# Altium PCB PCB_ASADCHUADARY.pcbdoc
Units mil, origin at the board's own origin, x right, y up, seen from the top; angles counter-clockwise.
Board outline 5763.18 x 4356.46 mil, 2 copper layers (Top Layer, Bottom Layer); 71 components, 90 nets, 266 pads, 23 vias.
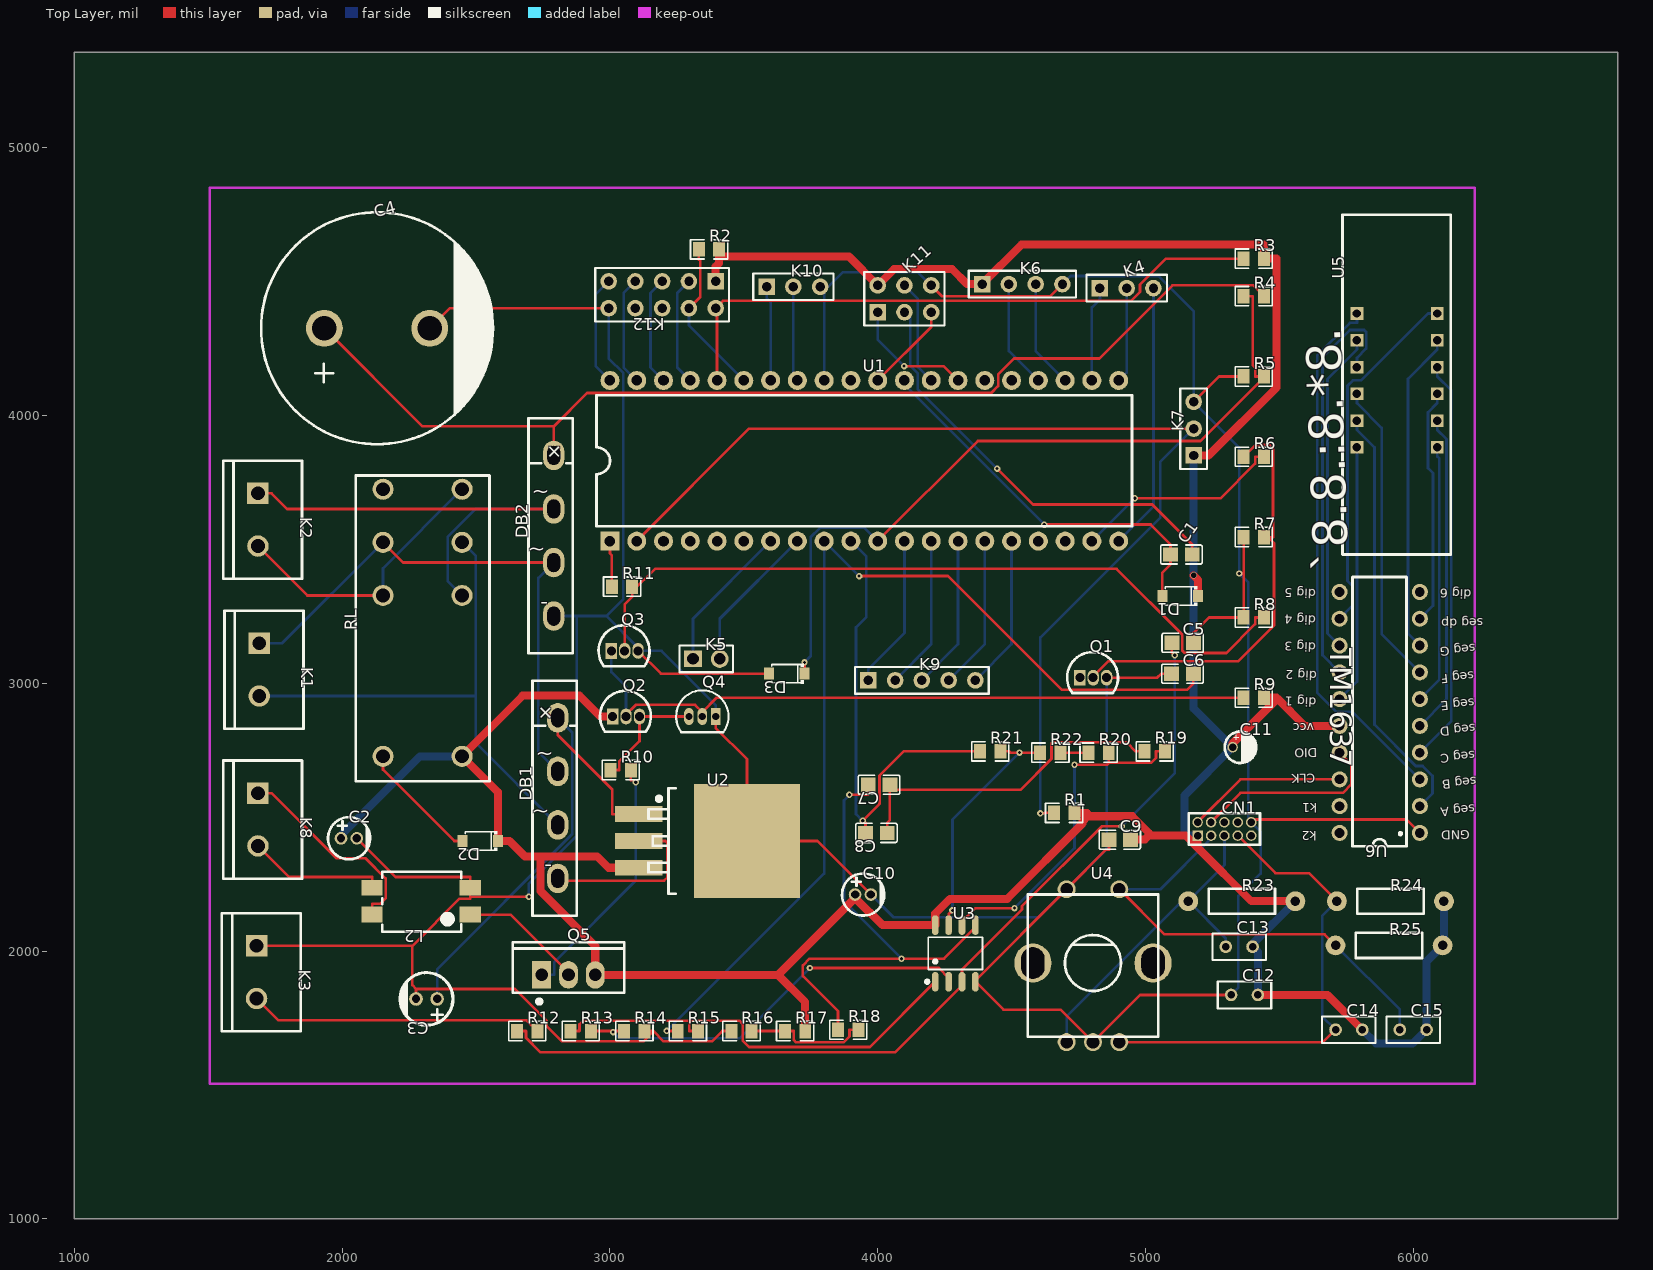
[diagram p0: Top Layer view]
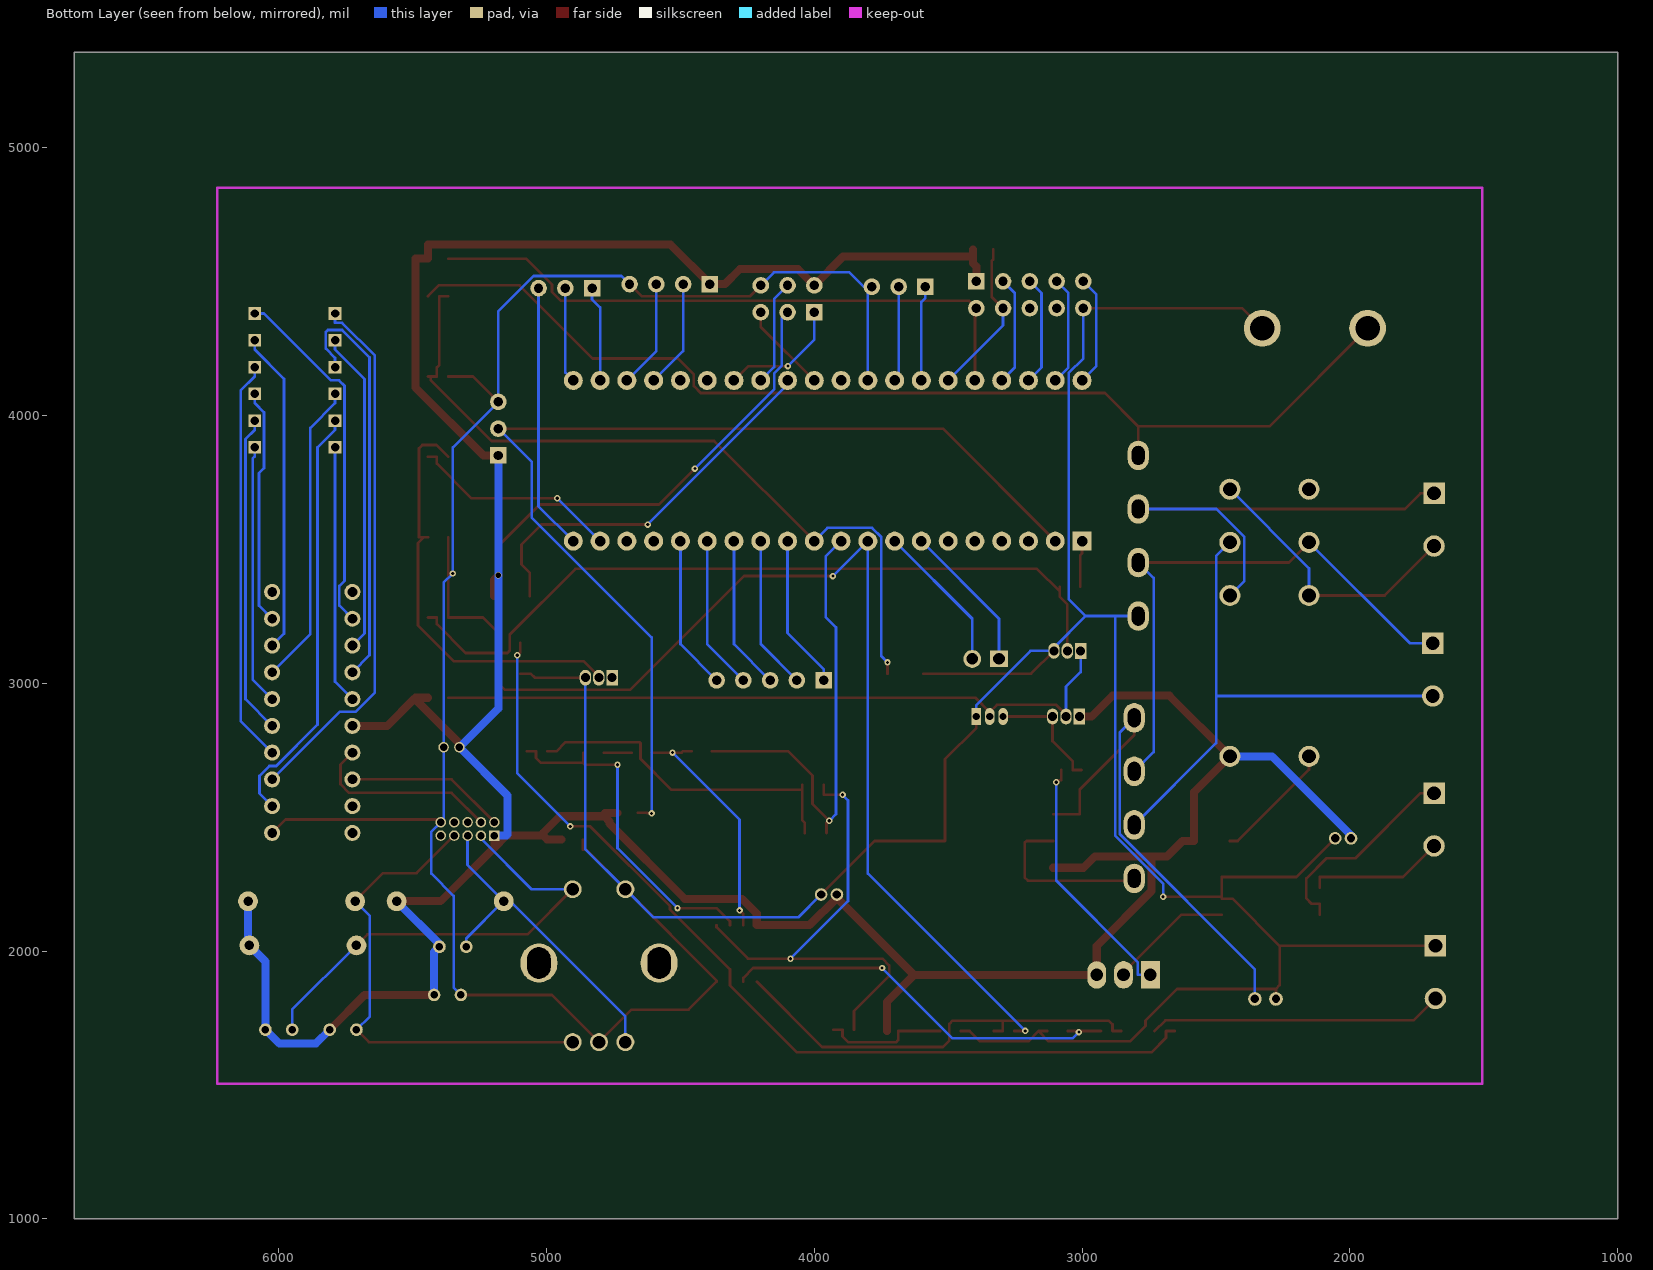
[diagram p1: Bottom Layer view, seen from below]

## Layer stack, top to bottom
Top Layer: signal copper (thickness not stored)
Dielectric: dielectric 12.6, FR-4, Dk 4.8
Bottom Layer: signal copper (thickness not stored)

## Board outline
6763.18,1000 1000,1000 1000,5356.46 6763.18,5356.46

## Components (designator, comment, footprint, x,y, rotation, side; value= is the part's Value field where it differs from the comment)
C1 "0.1u" C0805 5134.24,3481.46 r0 top
C2 "10uF" CAP-TH_BD4.0-P1.50-D0.8-FD 2025,2421.46 r0 top
C3 "100uF" CAP-TH_BD5.0-P2.00-D0.8-FD 2315,1821.46 r180 top
C4 "4700uF" CAP-TH_BD22.0-P10.00-D2.3-FD 2130,4326.46 r0 top
C5 "10n" C0805 5139.24,3151.46 r0 top
C6 "0.1u" C0805 5138.47,3036.46 r0 top
C7 "10n" C0805 4005,2621.46 r180 top
C8 "0.1u" C0805 3995,2441.46 r180 top
C9 "100n" C0805 4904.24,2416.46 r0 top
C10 "10uF" CAP-TH_BD4.0-P1.50-D0.8-FD 3945,2211.46 r0 top
C11 "100u" CAP-D3.0×F1.5 5355,2761.46 r0 top
C12 "100n" RAD-0.1 5370,1836.46 r0 top
C13 "1u" RAD-0.1 5350,2016.46 r0 top
C14 "1u" RAD-0.1 5760,1706.46 r0 top
C15 "1u" RAD-0.1 6000,1706.46 r0 top
CN1 "X1270WV-2X05A-6TV01" HDR-TH_10P-P1.27-V-F-R2-C5-S1.27 5295,2456.46 r0 top
D1 "1N4007W" SOD-123_L2.8-W1.8-LS3.7-RD 5130,3326.46 r180 top
D2 "1N4007W" SOD-123_L2.8-W1.8-LS3.7-RD 2515,2411.46 r180 top
D3 "MMSZ4689T1G" SOD-123_L2.8-W1.8-LS3.7-RD 3660,3036.46 r180 top
DB1 "GBU606_C394889" GBU_4P-L22.0-W3.5-P5.08 2805,2571.46 r90 top
DB2 "GBU606_C394889" GBU_4P-L22.0-W3.5-P5.08 2790,3551.46 r90 top
K1 "M025MM" SCREWTERMINAL-5MM-2 1690,3051.46 r270 top
K2 "M025MM" SCREWTERMINAL-5MM-2 1685,3611.46 r270 top
K3 "M025MM" SCREWTERMINAL-5MM-2 1680,1921.46 r270 top
K4 "HDR-M-2.54_1x3" HDR-M-2.54_1X3 4930,4476.46 r0 top
K5 "HDR-M-2.54_1x2" HDR-M-2.54_1X2 3360,3091.46 r0 top
K6 "HDR-M-2.54_1x4" HDR-M-2.54_1X4 4540,4491.46 r0 top
K7 "HDR-M-2.54_1x3" HDR-M-2.54_1X3 5180,3951.46 r90 top
K8 "M025MM" SCREWTERMINAL-5MM-2 1685,2491.46 r270 top
K9 "HDR-M-2.54_1x5" HDR-M-2.54_1X5 4165,3011.46 r0 top
K10 "HDR-M-2.54_1x3" HDR-M-2.54_1X3 3685,4481.46 r0 top
K11 "HDR-M-2.54_2x3" HDR-M-2.54_2X3 4000,4386.46 r0 top
K12 "HDR-M-2.54_2x5" HDR-M-2.54_2X5 3195,4451.46 r180 top
L2 "ZJYS51R5-2PT-01" FILTER-SMD_4P-L6.9-W5.5-P2.54-LS9.0-TL 2295,2186.46 r180 top
Q1 "BC547" TO-92-3_L4.8-W3.7-P1.27-L 4805,3021.46 r0 top
Q2 "BC547" TO-92-3_L4.8-W3.7-P1.27-L 3060,2876.46 r0 top
Q3 "BC547" TO-92-3_L4.8-W3.7-P1.27-L 3055,3121.46 r0 top
Q4 "BC557" TO-92-3_L4.9-W3.7-P1.27-R 3345,2876.46 r0 top
Q5 "IRF9Z34NPBF" TO-220-3_L10.0-W4.5-P2.54-L 2845,1911.46 r0 top
R1 "4.7k" R0805 4696.27,2516.46 r0 top
R2 "1k" R0805 3370,4621.46 r0 top
R3 "1k" R0805 5405,4586.46 r0 top
R4 "68K" R0805 5405,4446.46 r0 top
R5 "10k" R0805 5405,4146.46 r0 top
R6 "10k" R0805 5405,3846.46 r0 top
R7 "4.7k" R0805 5405,3546.46 r0 top
R8 "4.7k" R0805 5405,3246.46 r0 top
R9 "4.7" R0805 5405,2946.46 r0 top
R10 "100" R0805 3040,2676.46 r0 top
R11 "10k" R0805 3045,3361.46 r0 top
R12 "5.6K" R0805 2691.27,1701.46 r0 top
R13 "18k" R0805 2891.27,1701.46 r0 top
R14 "100" R0805 3091.27,1701.46 r0 top
R15 "5.6K" R0805 3291.27,1701.46 r0 top
R16 "10M" R0805 3491.27,1701.46 r0 top
R17 "1M" R0805 3691.27,1701.46 r0 top
R18 "5.6K" R0805 3890,1706.46 r0 top
R19 "100" R0805 5035,2746.46 r0 top
R20 "18k" R0805 4825,2741.46 r0 top
R21 "5.6K" R0805 4420,2746.46 r0 top
R22 "18k" R0805 4645,2741.46 r0 top
R23 "1k" R_AXIAL-0.4 5360,2186.46 r0 top
R24 "1k" R_AXIAL-0.4 5915,2186.46 r0 top
R25 "1k" R_AXIAL-0.4 5910,2021.46 r0 top
RL "RT424005F" RELAY-TH_RT42XXX 2300,3226.46 r90 top
U1 "ATMEGA4809-PF" PDIP-40_L52.3-W13.8-P2.54-LS15.2-BL 3950,3831.46 r0 top
U2 "TL780-05CKTTR" TO-263-3_L8.6-W10.2-P2.54-LS14.4-TL 3310,2411.46 r0 top
U3 "MCP6002M/TR" SOP-8_L4.9-W3.9-P1.27-LS6.0-BL 4290,1991.46 r0 top
U4 "PEC11R-4225F-S0024" PEC11R-4225F-S0024 4805,1951.46 r0 top
U5 "4_DIGIT_7-SEGMENT_DISPLAYTHROUGH_HOLE" 4_DIGIT_7-SEGMENT_DISPLAY 5840,4081.46 r90 top
U6 "TM1637" TM1637 5875,2891.46 r180 top

## Footprints (in the part's own frame and the unit in brackets; to place one, negate y for a bottom-side part, rotate by r counter-clockwise, add the part's x,y. Pads: shape width x height; smd on the part's side, far side on the other; paste and mask are expansions set on the pad)
4_DIGIT_7-SEGMENT_DISPLAY [mil]
  rect 47.2x47.2 hole 31.4: A(-100,50) B(300,50) C(100,-250) D(-100,-250) D1(-200,50) D2(100,50) D3(200,50) D4(300,-250) DP(0,-250) E(-200,-250) F(0,50) G(200,-250)
  silkscreen extent -600,-300 669,104
C0805 [mm]
  rect 1.41x1.35 smd: 1(-1.03,0) 2(1.03,0)
  silkscreen extent -1.96,-0.9 1.96,0.9
CAP-D3.0×F1.5 [mm]
  round 1 hole 0.7: 1(-0.751,0) 2(0.751,0)
  silkscreen extent -1.5,-1.5 1.5,1.5
CAP-TH_BD4.0-P1.50-D0.8-FD [mm]
  round 1.2 hole 0.8: 1(-0.75,0) 2(0.75,0)
  silkscreen extent -1.98,-2 2.06,2
CAP-TH_BD5.0-P2.00-D0.8-FD [mm]
  round 1.3 hole 0.8: 1(-1,0) 2(1,0)
  silkscreen extent -2.5,-2.5 2.5,2.5
CAP-TH_BD22.0-P10.00-D2.3-FD [mm]
  round 3.5 hole 2.3: 1(-5,0) 2(5,0)
  silkscreen extent -11,-11 11,11
FILTER-SMD_4P-L6.9-W5.5-P2.54-LS9.0-TL [mm]
  rect 2x1.5 smd: 1(-4.651,1.27) 2(-4.651,-1.27) 3(4.651,-1.27) 4(4.651,1.27)
  silkscreen extent -3.8,-2.8 3.7,2.9
GBU_4P-L22.0-W3.5-P5.08 [mm]
  oval 2.8x2 hole 1.2 slot 1.8 at 0 deg: 1(-7.62,0) 2(-2.54,0) 3(2.54,0) 4(7.62,0)
  silkscreen extent -11.15,-1.8 11.15,2.4
HDR-M-2.54_1X2 [mm]
  rect 1.7x1.575 hole 1.1: 1(-1.27,0)
  round 1.7 hole 1.1: 2(1.27,0)
  silkscreen extent -2.54,-1.27 2.54,1.27
HDR-M-2.54_1X3 [mil]
  rect 62x62 hole 35: 1(-100,0)
  round 62 hole 35: 2(0,0) 3(100,0)
  silkscreen extent -150,-50 150,50
HDR-M-2.54_1X4 [mil]
  rect 62x62 hole 35: 1(-150,0)
  round 62 hole 35: 2(-50,0) 3(50,0) 4(150,0)
  silkscreen extent -200,-50 200,50
HDR-M-2.54_1X5 [mil]
  rect 62x62 hole 35: 1(-200,0)
  round 62 hole 35: 2(-100,0) 3(0,0) 4(100,0) 5(200,0)
  silkscreen extent -250,-50 250,50
HDR-M-2.54_2X3 [mil]
  rect 62x62 hole 35: 1(0,0)
  round 62 hole 35: 2(0,100) 3(100,0) 4(100,100) 5(200,0) 6(200,100)
  silkscreen extent -50,-50 250,150
HDR-M-2.54_2X5 [mil]
  rect 62x62 hole 35: 1(-200,-50)
  round 62 hole 35: 2(-200,50) 3(-100,-50) 4(-100,50) 5(0,-50) 6(0,50) 7(100,-50) 8(100,50) 9(200,-50) 10(200,50)
  silkscreen extent -250,-100 250,100
HDR-TH_10P-P1.27-V-F-R2-C5-S1.27 [mm]
  rect 1x1 hole 0.7: 1(-2.54,-0.635)
  round 1 hole 0.7: 2(-2.54,0.635) 3(-1.27,-0.635) 4(-1.27,0.635) 5(0,-0.635) 6(0,0.635) 7(1.27,-0.635) 8(1.27,0.635) 9(2.54,-0.635) 10(2.54,0.635)
  silkscreen extent -3.38,-1.5 3.38,1.5
PDIP-40_L52.3-W13.8-P2.54-LS15.2-BL [mm]
  rect 1.8x1.8 hole 1: 1(-24.13,-7.62)
  round 1.8 hole 1: 2(-21.59,-7.62) 3(-19.05,-7.62) 4(-16.51,-7.62) 5(-13.97,-7.62) 6(-11.43,-7.62) 7(-8.89,-7.62) 8(-6.35,-7.62) 9(-3.81,-7.62) 10(-1.27,-7.62) 11(1.27,-7.62) 12(3.81,-7.62) 13(6.35,-7.62) 14(8.89,-7.62) 15(11.43,-7.62) 16(13.97,-7.62) 17(16.51,-7.62) 18(19.05,-7.62) 19(21.59,-7.62) 20(24.13,-7.62) 21(24.13,7.62) 22(21.59,7.62) 23(19.05,7.62) 24(16.51,7.62) 25(13.97,7.62) 26(11.43,7.62) 27(8.89,7.62) 28(6.35,7.62) 29(3.81,7.62) 30(1.27,7.62) 31(-1.27,7.62) 32(-3.81,7.62) 33(-6.35,7.62) 34(-8.89,7.62) 35(-11.43,7.62) 36(-13.97,7.62) 37(-16.51,7.62) 38(-19.05,7.62) 39(-21.59,7.62) 40(-24.13,7.62)
  silkscreen extent -25.4,-6.22 25.4,6.22
PEC11R-4225F-S0024 [mm]
  round 1.7 hole 1.2: 1(-2.523,7.104) 2(2.477,7.104) 3(-2.523,-7.396) 4(-0.023,-7.396) 5(2.477,-7.396)
  oval 3.5x3.7 hole 2.2 slot 3 at 90 deg: 6(-5.723,0.104) 7(5.677,0.104)
  silkscreen extent -6.22,-6.9 6.18,6.6
R0805 [mil]
  rect 44.59x54.21 smd: 1(-38.04,0) 2(38.04,0)
  silkscreen extent -69,-36 69,36
R_AXIAL-0.4 [mil]
  round 74 hole 35.4: 1(-200,0) 2(200,0)
  silkscreen extent -124,-47 124,47
RAD-0.1 [mil]
  round 47 hole 28: 1(-50,0) 2(50,0)
  silkscreen extent -100,-50 100,50
RELAY-TH_RT42XXX [mm]
  round 2 hole 1.3: 11(7.63,-3.75) 12(2.59,-3.75) 14(12.67,-3.75) 21(7.63,3.75) 22(2.59,3.75) 24(12.67,3.75) A1(-12.67,-3.75) A2(-12.67,3.75)
  silkscreen extent -15.02,-6.35 13.98,6.35
SCREWTERMINAL-5MM-2 [mil]
  rect 80x80 hole 51.2: 1(-98.5,0)
  round 80 hole 51.2: 2(98.5,0)
  silkscreen extent -221,-130 221,165
SOD-123_L2.8-W1.8-LS3.7-RD [mm]
  rect 0.95x1.15 smd: 1(-1.693,0) 2(1.693,0)
  silkscreen extent -1.63,-0.94 1.41,0.94
SOP-8_L4.9-W3.9-P1.27-LS6.0-BL [mm]
  oval 0.63x1.865 smd: 1(-1.905,-2.682) 2(-0.635,-2.682) 3(0.635,-2.682) 4(1.905,-2.682) 5(1.905,2.682) 6(0.635,2.682) 7(-0.635,2.682) 8(-1.905,2.682)
  silkscreen extent -2.82,-2.83 2.58,1.52
TM1637 [mil]
  round 60 hole 36: 1(-150,450) 2(-150,350) 3(-150,250) 4(-150,150) 5(-150,50) 6(-150,-50) 7(-150,-150) 8(-150,-250) 9(-150,-350) 10(-150,-450) 11(150,-450) 12(150,-350) 13(150,-250) 14(150,-150) 15(150,-50) 16(150,50) 17(150,150) 18(150,250) 19(150,350) 20(150,450)
  silkscreen extent -100,-506 102,500
TO-92-3_L4.8-W3.7-P1.27-L [mm]
  rect 1.07x1.5 hole 0.85: 1(-1.27,0)
  oval 1.07x1.5 hole 0.85: 2(0,0) 3(1.27,0)
  silkscreen extent -2.48,-1.45 2.36,2.43
TO-92-3_L4.9-W3.7-P1.27-R [mm]
  rect 0.9x1.6 hole 0.7: 1(1.27,0)
  oval 0.9x1.6 hole 0.7: 2(0,0) 3(-1.27,0)
  silkscreen extent -2.48,-1.5 2.48,2.48
TO-220-3_L10.0-W4.5-P2.54-L [mm]
  rect 1.8x2.6 hole 1.2: 1(-2.54,0.005)
  oval 1.8x2.6 hole 1.2: 2(0,0.005) 3(2.54,-0.005)
  silkscreen extent -5.3,-2.73 5.3,3.09
TO-263-3_L8.6-W10.2-P2.54-LS14.4-TL [mm]
  rect 4.5x1.511 smd: 1(-5.129,2.54) 2(-5.129,0) 3(-5.129,-2.54)
  rect 10.02x10.8 smd: 4(5.129,0)
  silkscreen extent -4.23,-5 -1.63,5

## Via types
v1: diameter 24.02, hole 12.01, Top Layer to Bottom Layer, tented both sides, 22 vias
v2: diameter 24.02, hole 20, Top Layer to Bottom Layer, tented both sides, 1 vias

## Nets (pads, with @x,y where several pads share a name; then routed paths per layer and width w, separated by ;. In a path a pad name is that pad's centre, name@x,y a point inside that pad or via, vN(x,y) a via of type N, cw(c..) or ccw(c..) an arc to the next point about the centre after c; other vN are vias at no path point)
+5V: C2.1 C9.2 C10.1 C11.1 C12.2 C13.2 C14.2 C15.2 CN1.1 D1.1 D2.1 K6.1 K7.1 K11.2 K12.1 Q2.1 Q5.3 R1.2 R2.2 R3.2 R9.2 R17.2 R23.2 R24.2 R25.2 RL.A1 U2.3 U3.8 U6.16 | length 13528.7
  Top Layer w30: Q2.1 2963.93,2876.46 2886.38,2954.01 2674.01,2954.01 RL.A1 2581.63,2593.65 D2.1 2625.35,2411.46 2683.14,2353.67 2740.05,2353.67 ; U2.3 2994.49,2311.46 2952.28,2353.67 2740.05,2353.67 ; K12.1 3395,4557.47 3406.87,4569.34 3408.04,4569.34 3408.04,4593.96 ; R2.2 3408.04,4593.96 ; R17.2 3729.31,1809.62 3627.67,1911.26 ; C10.1 C10.1@3915.47,2199.06 ; R1.2 4781.62,2516.46 4781.62,2506.52 4784.36,2503.78 ; C9.2 4997.56,2416.46 5012.56,2431.46 ; v2(5180,3403.67) 5196.63,3387.04 D1.1 ; K7.1 5236.01,3851.46 5490.35,4105.8 5490.35,4586.46 R3.2 5443.04,4638.58 4537.12,4638.58 K6.1 4333.99,4491.46 4278.32,4547.13 4060.67,4547.13 K11.2 3892.5,4593.96 3408.04,4593.96 ; CN1.1 5195,2386.77 ; C11.1 5325.45,2775.53 5493.37,2943.45 ; C12.2 5680,1836.46 C14.2 ; R9.2 5490.35,2946.46 5493.37,2943.45 ; R23.2 5395.31,2186.46 5195,2386.77 ; U6.16 5595.35,2841.46 5493.37,2943.45 ; 2740.05,2353.67 2740.05,2224.41 2945.01,2019.45 Q5.3 3627.67,1911.26 ; 3627.67,1911.26 C10.1@3915.47,2199.06 ; C10.1@3915.47,2199.06 4017.46,2097.07 U3.8 4215,2140.14 4270.22,2195.36 4483.9,2195.36 4764.93,2476.39 4764.93,2484.35 4784.36,2503.78 ; 4784.36,2503.78 4950.88,2503.78 5012.56,2442.1 5012.56,2431.46 ; 5012.56,2431.46 5150.31,2431.46 5195,2386.77
  Bottom Layer w30: C2.1 1995.47,2432.95 2290.16,2727.64 RL.A1 ; K7.1 v2(5180,3403.67) 5180,2906.91 C11.1 5145.55,2581.56 5145.55,2436.22 5150.31,2431.46 CN1.1 ; C12.2 5420,1996.46 C13.2 5400,2026.46 R23.2 ; C14.2 5861.85,1654.61 5998.15,1654.61 C15.2 6050,1961.46 R25.2 6115,2026.46 R24.2
CN1_2: CN1.2 U6.18 | length 596.3
  Top Layer w10: CN1.2 5355,2641.46 U6.18
CN1_4: CN1.4 U6.17 | length 720.4
  Top Layer w10: CN1.4 5355,2591.46 5737.97,2591.46 5769.94,2623.43 5769.94,2696.52 U6.17
CN1_9: CN1.9
DB1_1: DB1.1 U2.2 | length 655.8
  Top Layer w10: DB1.1 2812.96,2263.5 3202.28,2263.5 3214.25,2275.47 3214.25,2404.87 3207.66,2411.46 U2.2
DB1_2: DB1.2 K1.2 RL.11 | length 2012.5
  Bottom Layer w10: K1.2 2499.14,2952.96 ; RL.11@2447.65,3526.85 2499.14,3475.36 2499.14,2952.96 ; DB1.2 2499.14,2777.32 2499.14,2952.96
DB1_3: DB1.3 DB2.2 K1.1 RL.21 | length 2121.2
  Top Layer w10: RL.21 2227.76,3451.46 DB2.2
  Bottom Layer w10: K1.1 1775.48,3149.96 RL.21 ; DB2.2 2732.53,3393.99 2732.53,2743.93 DB1.3
DB1_4: C3.1 DB1.4 U2.1 | length 1825.4
  Top Layer w10: DB1.4 2805,2806.85 3008.51,2603.34 3008.51,2511.46 U2.1
  Bottom Layer w10: C3.1 2354.37,1932.12 2859.18,2436.93 2859.18,2817.28 DB1.4
DB2_3: DB2.3 K2.1 RL.12 | length 1809.6
  Top Layer w10: K2.1 1735.99,3709.96 1794.49,3651.46 DB2.3
  Bottom Layer w10: RL.12 2393.97,3382.1 2393.97,3547.54 2497.89,3651.46 DB2.3
DB2_4: C4.1 DB2.4 R4.2 | length 4030.4
  Top Layer w10: C4.1 2299.25,3960.36 2790,3960.36 ; DB2.4 2790,3960.36 ; R4.2 5402.82,4486.68 5100.8,4486.68 4827.69,4213.57 4509.47,4213.57 4450,4154.1 4450,4110.89 4424.08,4084.97 2914.61,4084.97 2790,3960.36
GND: C2.2 C3.2 C4.2 C5.2 C6.1 C9.1 C10.2 C11.2 C12.1 CN1.10 D3.2 DB2.1 K3.1 K6.4 K7.3 K10.3 K11.6 K12.10 L2.2 Q1.3 Q3.3 Q4.1 R5.1 R7.1 R8.1 R14.2 R16.1 U1.32 U2.4 U3.4 U4.1 U4.4 U6.1 | length 18418.4
  Top Layer w10: K3.1 2261.6,2019.96 ; C2.2 2199.01,2276.98 2478.1,2276.98 L2.2 2478.1,2203.05 ; C3.2 2275.63,1858.65 ; C4.2 2401.85,4401.46 K12.10 ; v1(2697.21,2203.05) 2478.1,2203.05 ; Q3.3 3190,3036.46 D3.2 ; R14.2 3162.6,1701.46 ; Q4.1 3395,2833.97 3511.92,2717.05 U2.4 3774.53,2411.46 C10.2 ; R16.1 3419.94,1701.46 3381.77,1663.29 3200.77,1663.29 3162.6,1701.46 ; K11.6 4241.02,4445.44 4643.98,4445.44 K6.4 ; Q1.3 5044.17,3021.46 5059.17,3036.46 C6.1 ; C9.1 4863.69,2378.9 4853.42,2378.9 U4.1 4365,1890.48 U3.4 4469.28,1781.57 4682.8,1781.57 U4.4 4980.27,1836.46 C12.1 ; C5.2 5179.79,3189.03 5237.22,3246.46 R8.1 5366.96,3410.49 ; K7.3 5275,4146.46 R5.1 ; v1(5350.15,3410.49) 5366.96,3410.49 ; R7.1 5366.96,3410.49 ; CN1.10 5405,2491.46 5975,2491.46 U6.1 ; 2261.6,2019.96 2437.58,2195.94 2478.1,2195.94 2478.1,2203.05 ; 2261.6,2019.96 2261.6,1872.68 2275.63,1858.65 ; 2275.63,1858.65 2644.5,1858.65 2762.67,1740.48 2762.67,1721.17 2820.55,1663.29 3124.43,1663.29 3162.6,1701.46
  Bottom Layer w10: v1(2697.21,2203.05) 2697.21,2252.25 2876.41,2431.45 2876.41,3251.46 ; DB2.1 2876.41,3251.46 ; K12.10 2995,4213.75 3050,4158.75 3050,3314.78 2986.68,3251.46 ; Q4.1 3395,2918.95 3192.49,3121.46 Q3.3 3105,3133.14 2986.68,3251.46 ; K10.3 K10.3@3800,4466.46 ; U1.32 K10.3@3800,4466.46 ; C10.2 4059.88,2126.11 4600.63,2126.11 U4.1 4855,2380.48 Q1.3 ; K11.6 4151.06,4535.4 3868.94,4535.4 K10.3@3800,4466.46 ; K6.4 4720.08,4521.54 5049.06,4521.54 5180,4390.6 K7.3 5350.15,3881.31 v1(5350.15,3410.49) 5384.55,3376.09 C11.2 5384.55,2491.91 CN1.10 5430.2,2446.26 5430.2,2289.51 5347.21,2206.52 5347.21,1863.67 C12.1 ; 2876.41,3251.46 2986.68,3251.46
K3_2: K3.2 R12.2 | length 1099.6
  Top Layer w10: K3.2 1761.22,1741.74 2689.03,1741.74 R12.2
K11_3: C1.2 K11.3 | length 1611.2
  Top Layer w10: v1(4445.96,3802.26) 4579.88,3668.34 5025.48,3668.34 5174.79,3519.03 C1.2
  Bottom Layer w10: K11.3 4121.68,4364.78 4121.68,4186.24 4150,4157.92 4150,4098.22 v1(4445.96,3802.26)
L2_3: K8.2 L2.3 | length 515.5
  Top Layer w10: K8.2 1800.98,2276.98 2111.9,2276.98 L2.3
L2_4: K8.1 L2.4 | length 782.7
  Top Layer w10: K8.1 1735.99,2589.96 1979.04,2346.91 2086.45,2346.91 2162.33,2271.03 2162.33,2197.02 2142.29,2176.98 2111.9,2176.98 L2.4
PD0: C6.2 R15.1 U1.9 | length 3770.2
  Top Layer w10: v1(3211.85,1702.14) 3219.26,1702.14 3219.94,1701.46 R15.1 ; v1(3930.57,3400.89) 4262.81,3400.89 4687.09,2976.61 5156.73,2976.61 5179.02,2998.9 C6.2
  Bottom Layer w10: v1(3211.85,1702.14) 3800,2290.29 U1.9 v1(3930.57,3400.89)
PD1: C8.2 R21.1 U1.10 | length 1754.1
  Top Layer w10: C8.2 3954.45,2479.03 3951.61,2479.03 v1(3943.83,2486.81) 4006.74,2549.72 4006.74,2656.16 4097.04,2746.46 R21.1
  Bottom Layer w10: U1.10 3957.44,3474.02 3957.44,3247.62 3918.97,3209.15 3918.97,2511.67 v1(3943.83,2486.81)
PD2: D3.1 R4.1 R5.2 U1.11 | length 2870.9
  Top Layer w10: D3.1 v1(3726.63,3078.3) ; U1.11 4374.15,3905.61 5205.45,3905.61 5433.1,4133.26 R5.2@5433.1,4146.46 ; R4.1 5400.24,4446.46 5400.24,4189.26 5409.76,4179.74 5409.76,4146.46 R5.2@5433.1,4146.46 ; R5.2 R5.2@5433.1,4146.46
  Bottom Layer w10: v1(3726.63,3078.3) 3750,3101.67 3750,3547.25 3783.63,3580.88 3950.58,3580.88 U1.11
Q1_2: Q1.2 R6.1 R7.2 | length 1596
  Top Layer w10: Q1.2 4805,3026.6 4860.76,3082.36 5346.15,3082.36 5480.34,3216.55 5480.34,3524.28 R7.2@5458.16,3546.46 ; R6.1 5410.95,3890.45 5464.08,3890.45 5476.4,3878.13 5476.4,3546.53 5476.33,3546.46 R7.2@5458.16,3546.46 ; R7.2 R7.2@5458.16,3546.46
Q2_2: Q2.2 Q3.1 Q4.2 R9.1 | length 2646.7
  Top Layer w10: Q2.2 3060,2883.65 3096.24,2919.89 3317.9,2919.89 Q4.2@3345,2892.79 ; Q4.2 Q4.2@3345,2892.79 ; R9.1 3398.67,2946.46 Q4.2@3345,2892.79
  Bottom Layer w10: Q3.1 3005,3042.9 3060,2987.9 Q2.2
Q2_3: Q2.3 Q4.3 R10.1 | length 449.2
  Top Layer w10: R10.1 3035.24,2676.46 3035.24,2709.74 3110,2784.5 Q2.3 Q4.3
Q3_2: Q3.2 R8.2 R11.2 | length 2882.1
  Top Layer w10: Q3.2 3055,3295.32 3083.04,3323.36 R11.2@3083.04,3342.41 ; R11.2 R11.2@3083.04,3342.41 ; R8.2 5409.76,3246.46 5409.76,3221.5 5302.09,3113.83 5146.11,3113.83 5137.51,3122.43 5137.51,3182.61 4892.04,3428.08 3168.71,3428.08 R11.2@3083.04,3342.41
Q5_2: L2.1 Q5.2 | length 464.6
  Top Layer w10: L2.1 2627.98,2136.46 2845,1919.44 Q5.2@2845,1911.65
R10_2: Q5.1 R10.2 | length 951.3
  Top Layer w10: R10.2 3078.04,2638.36 3088.64,2638.36 v1(3096.37,2630.63)
  Bottom Layer w10: Q5.1@2745,1911.65 2791.42,1911.65 2791.42,1958.07 3096.37,2263.02 v1(3096.37,2630.63)
R16_2: R16.2 R17.1 R18.2 | length 469.8
  Top Layer w10: R16.2 R17.1 3669.87,1701.46 3686.51,1701.46 3686.51,1668.18 3695.35,1659.34 3872.6,1659.34 3894.76,1681.5 3894.76,1706.46 R18.2
R19_1: C7.1 C8.1 R19.1 | length 1256.7
  Top Layer w10: C8.1 4035.55,2479.03 4045.55,2489.03 4045.55,2583.9 C7.1@4045.55,2602.68 ; C7.1 C7.1@4045.55,2602.68 ; R19.1 4963.67,2746.46 4930.5,2779.63 4651.95,2779.63 4649.04,2776.72 4649.04,2718.51 4533.21,2602.68 C7.1@4045.55,2602.68
R20_1: R20.1 R22.2 | length 103.9
  Top Layer w10: R22.2 R20.1
RL1: D2.2 RL.A2 | length 456.2
  Top Layer w10: RL.A2 2152.36,2677.78 2418.68,2411.46 D2.2
RL_22: K2.2 RL.14 RL.22 | length 1063
  Top Layer w10: K2.2 1869.53,3328.43 RL.22
  Bottom Layer w10: RL.22 2152.36,3429.99 RL.14
S$180: 
TR1: Q1.1
U1_1: R11.1 U1.1 | length 172.9
  Top Layer w10: U1.1 3000,3485.04 3006.96,3478.08 R11.1
U1_2: K7.2 R1.1 U1.2 | length 3979.5
  Top Layer w10: U1.2 3520,3951.46 K7.2 ; v1(4607.53,2514.58) 4623.06,2514.58 4624.94,2516.46 R1.1
  Bottom Layer w10: v1(4607.53,2514.58) 4607.53,3171.32 5054.8,3618.59 5054.8,3826.26 K7.2
U1_3: U1.3
U1_4: U1.4
U1_5: U1.5
U1_6: U1.6
U1_7: K5.1 U1.7 | length 560.1
  Bottom Layer w10: K5.1 3310,3241.46 U1.7
U1_8: K5.2 U1.8 | length 560.1
  Bottom Layer w10: K5.2 3410,3241.46 U1.8
U1_12: K9.1 U1.12 | length 575.9
  Bottom Layer w10: K9.1 3965,3053.45 4100,3188.45 U1.12
U1_13: K9.2 U1.13 | length 575.9
  Bottom Layer w10: K9.2 4200,3146.46 U1.13
U1_14: K9.3 U1.14 | length 575.9
  Bottom Layer w10: K9.3 4300,3146.46 U1.14
U1_15: K9.4 U1.15 | length 575.9
  Bottom Layer w10: K9.4 4400,3146.46 U1.15
U1_16: K9.5 U1.16 | length 575.9
  Bottom Layer w10: K9.5 4500,3146.46 U1.16
U1_17: U1.17
U1_18: U1.18
U1_19: R6.2 U1.19 | length 788.1
  Top Layer w10: v1(4959.94,3691.4) 5279.66,3691.4 5409.76,3821.5 5409.76,3846.46 R6.2
  Bottom Layer w10: U1.19 v1(4959.94,3691.4)
U1_20: K4.3 U1.20 | length 998.8
  Bottom Layer w10: U1.20 5030,3661.46 K4.3
U1_21: K4.2 U1.21 | length 357.4
  Bottom Layer w10: U1.21 4930,4161.46 K4.2
U1_22: K4.1 U1.22 | length 357.4
  Bottom Layer w10: U1.22 4800,4404.47 4830,4434.47 K4.1
U1_23: K6.3 U1.23 | length 405.6
  Bottom Layer w10: K6.3 4590,4241.46 U1.23
U1_24: K6.2 U1.24 | length 405.6
  Bottom Layer w10: K6.2 4490,4241.46 U1.24
U1_25: U1.25
U1_26: U1.26
U1_27: K11.1 U1.27 | length 465.8
  Top Layer w10: v1(4098.62,4185.17) 4246.29,4185.17 U1.27
  Bottom Layer w10: K11.1 4000,4283.79 v1(4098.62,4185.17)
U1_28: K11.4 U1.28 | length 396.4
  Bottom Layer w10: K11.4 4150,4436.46 4150,4181.46 U1.28
U1_29: C1.1 D1.2 U1.29 | length 1461.8
  Top Layer w10: v1(4622.29,3593.32) 5019.4,3593.32 5093.69,3519.03 C1.1 5093.69,3443.9 5063.37,3413.58 D1.2
  Bottom Layer w10: U1.29 4100,4115.61 v1(4622.29,3593.32)
U1_30: K11.5 U1.30 | length 337.8
  Top Layer w10: U1.30 4200,4331.46 K11.5
U1_31: U1.31
U1_33: K10.2 U1.33 | length 356.2
  Bottom Layer w10: K10.2 3685,4146.46 U1.33
U1_34: K10.1 U1.34 | length 356.2
  Bottom Layer w10: K10.1 3585,4439.47 3600,4424.47 U1.34
U1_35: K12.4 R2.1 U1.35 | length 594.9
  Top Layer w10: K12.4 3337.65,4444.11 3337.65,4577.67 3331.96,4583.36 R2.1
  Bottom Layer w10: K12.4 3295,4336.46 U1.35
U1_36: K12.2 R3.1 U1.36 | length 2336.8
  Top Layer w10: U1.36 3400,4396.46 K12.2 3422.36,4428.82 4946.91,4428.82 4980,4461.91 4980,4489.43 5077.03,4586.46 R3.1
U1_37: K12.3 U1.37 | length 408.3
  Bottom Layer w10: K12.3 3251.25,4457.71 3251.25,4180.21 U1.37
U1_38: K12.5 U1.38 | length 408.3
  Bottom Layer w10: K12.5 3151.25,4457.71 3151.25,4180.21 U1.38
U1_39: K12.7 U1.39 | length 408.3
  Bottom Layer w10: K12.7 3051.25,4457.71 3051.25,4180.21 U1.39
U1_40: K12.9 U1.40 | length 411.6
  Bottom Layer w10: K12.9 2947.29,4453.75 2947.29,4184.17 U1.40
U3_1: R13.1 R15.2 U3.1 | length 1642.8
  Top Layer w10: R13.1 2886.51,1701.46 2886.51,1726.42 2900.53,1740.44 3296.03,1740.44 ; R15.2 3296.03,1701.46 3296.03,1740.44 ; U3.1 3971.36,1642.21 3519.85,1642.21 3495.86,1666.2 3495.86,1728.25 3483.67,1740.44 3296.03,1740.44
U3_2: R13.2 R14.1 U3.2 | length 1535.5
  Top Layer w10: R13.2 v1@3019.94,1701.46 ; v1(3011.54,1697.74) 3016.22,1697.74 v1@3019.94,1701.46 ; R14.1 v1@3019.94,1701.46 ; v1(3746.65,1937.11) 4228.29,1937.11 4265,1900.4 U3.2
  Bottom Layer w10: v1(3011.54,1697.74) 3034.77,1674.51 3484.05,1674.51 v1(3746.65,1937.11)
U3_3: C5.1 R12.1 U3.3 | length 3470.6
  Top Layer w10: R12.1 2686.51,1701.46 2686.51,1676.5 2741.19,1621.82 4064.75,1621.82 4315,1872.07 U3.3 4315,1932.07 4539.04,2156.11 4539.04,2168.14 4836.8,2465.9 v1(4911.15,2465.9) ; C5.1 5098.69,3113.9 5100.82,3113.9 v1(5109.3,3105.42)
  Bottom Layer w10: v1(4911.15,2465.9) 5109.3,2664.05 v1(5109.3,3105.42)
U3_5: C7.2 R18.1 U3.5 | length 1823.3
  Top Layer w10: R18.1 3851.96,1775.71 3720.41,1907.26 3720.41,1947.22 3745.13,1971.94 v1(4088.89,1971.94) 4247.36,1971.94 4365,2089.58 U3.5 ; v1(3894.52,2583.9) 3964.45,2583.9 C7.2
  Bottom Layer w10: v1(3894.52,2583.9) 3873.94,2563.32 3873.94,2186.89 v1(4088.89,1971.94)
U3_6: R19.2 R20.2 U3.6 | length 1270.5
  Top Layer w10: U3.6 4315,2111.16 4364.6,2160.76 v1(4511.07,2160.76) ; v1(4735,2696.18) 4855.91,2696.18 4863.04,2703.31 ; R20.2 4863.04,2703.31 ; R19.2 5039.76,2746.46 5039.76,2721.5 5021.57,2703.31 4863.04,2703.31
  Bottom Layer w10: v1(4511.07,2160.76) 4735,2384.69 v1(4735,2696.18)
U3_7: R21.2 R22.1 U3.7 | length 905
  Top Layer w10: U3.7 4265,2137.79 v1(4279.13,2151.92) ; R21.2 4491.33,2746.46 4496.33,2741.46 v1(4529.73,2741.46) R22.1
  Bottom Layer w10: v1(4279.13,2151.92) 4279.13,2490.86 v1(4529.73,2741.46)
U4_2: C15.1 CN1.3 R25.1 U4.2 | length 1740.5
  Top Layer w10: U4.2 5070.74,2062.93 5668.53,2062.93 R25.1
  Bottom Layer w10: U4.2 5055.44,2231.15 5245,2420.71 CN1.3 ; R25.1 5950,1781.46 C15.1
U4_3: C13.1 CN1.5 R23.1 U4.3 | length 1257.2
  Bottom Layer w10: U4.3 4705.67,1755.86 5136.27,2186.46 R23.1 ; CN1.5 5295,2321.46 R23.1 ; C13.1 5300,2046.46 R23.1
U4_5: C14.1 CN1.7 R24.1 U4.5 | length 1821.7
  Top Layer w10: U4.5 5663.82,1660.28 C14.1 ; CN1.7 5485.16,2291.3 5610.16,2291.3 R24.1
  Bottom Layer w10: C14.1 5659.91,1756.55 5659.91,2131.37 R24.1
U5_A: U5.A U6.2 | length 1591.5
  Bottom Layer w10: U5.A 5790,3946.87 5855.34,3881.53 5855.34,2845.74 6009.62,2691.46 6035.29,2691.46 6072.25,2654.5 6072.25,2588.71 U6.2
U5_B: U5.B U6.3 | length 2009.8
  Bottom Layer w10: U5.B 5790,4346.87 5764.06,4346.87 5641.39,4224.2 5641.39,2966.85 5714.44,2893.8 5772.66,2893.8 U6.3
U5_C: U5.C U6.4 | length 1509.8
  Bottom Layer w10: U6.4 6141.74,2858.2 6141.74,4095.13 6090,4146.87 U5.C
U5_D: U5.D U6.5 | length 1195.6
  Bottom Layer w10: U6.5 6124.65,2941.11 6124.65,3912.22 6090,3946.87 U5.D
U5_D1: U5.D1 U6.15 | length 966.9
  Bottom Layer w10: U6.15 5790,3006.46 U5.D1
U5_D2: U5.D2 U6.14 | length 1557.4
  Bottom Layer w10: U6.14 5661.06,3105.4 5661.06,4217.85 5763.38,4320.17 5817,4320.17 5824.66,4312.51 5824.66,4250.71 5790,4216.05 U5.D2
U5_D3: U5.D3 U6.13 | length 1204.4
  Bottom Layer w10: U6.13 5679.76,3186.7 5679.76,4136.63 5790,4246.87 U5.D3
U5_D4: U5.D4 U6.12 | length 1345.3
  Bottom Layer w10: U6.12 5773.92,3290.38 5773.92,3363.94 5754.87,3382.99 5754.87,4111.7 5775.01,4131.84 5805.79,4131.84 6055.41,4381.46 U5.D4
U5_DP: U5.DP U6.9 | length 882.5
  Bottom Layer w10: U6.9 6074.15,3290.61 6074.15,3785.39 6055.35,3804.19 6055.35,4012.22 6090,4046.87 U5.DP
U5_E: U5.E U6.6 | length 973.2
  Bottom Layer w10: U6.6 6097.54,3014 6097.54,3839.33 6090,3846.87 U5.E
U5_F: U5.F U6.7 | length 1137.3
  Bottom Layer w10: U5.F 5790,4046.87 5882.33,3954.54 5882.33,3184.13 U6.7
U5_G: U5.G U6.8 | length 1203.5
  Bottom Layer w10: U6.8 5980.79,3185.67 5980.79,4137.66 6090,4246.87 U5.G
U6_10: U6.10
U6_11: U6.11
pads on no net: CN1.6 CN1.8 K12.6 K12.8 RL.24 U4.6 U4.7 U6.19 U6.20

## Text inside footprints (layer, text, board x,y; h text height)
DB1: Top Overlay "+" at 2765.32,2932.34 h59.05 r225; Top Overlay "~" at 2790,2760.98 h59.05 r180; Top Overlay "~" at 2775,2545.98 h59.05 r180; Top Overlay "-" at 2785,2340.98 h59.05 r180
DB2: Top Overlay "+" at 2750.32,3870.58 h59.05 r315; Top Overlay "~" at 2775,3740.98 h59.05 r180; Top Overlay "~" at 2760,3525.98 h59.05 r180; Top Overlay "-" at 2770,3320.98 h59.05 r180
U5: Top Overlay "`8.8.:8.*8." at 5759.96,3418.73 h130 r92
U6: Top Overlay "dig 5" at 5637.4,3364.05 h59.05 r178; Top Overlay "GND" at 6212.04,2463.68 h59.05 r181; Top Overlay "dig 3" at 5637.4,3165.05 h59.05 r178; Top Overlay "dig 4" at 5637.4,3265.41 h59.05 r178; Top Overlay "dig 6" at 6219.55,3362.39 h59.05 r178; Top Overlay "vcc" at 5630.59,2865.18 h59.05 r180; Top Overlay "seg D" at 6230.25,2863.03 h59.05 r186; Top Overlay "seg C" at 6228.95,2762.18 h59.05 r186; Top Overlay "seg B" at 6234.13,2664.82 h59.05 r186; Top Overlay "seg A" at 6228.95,2561.33 h59.05 r186; Top Overlay "seg dp" at 6262.15,3256.44 h59.05 r181; Top Overlay "seg G" at 6229.55,3161.6 h59.05 r186; Top Overlay "seg F" at 6224.95,3057.89 h59.05 r186; Top Overlay "seg E" at 6225.55,2957.04 h59.05 r186; Top Overlay "dig 2" at 5641.91,3058.39 h59.05 r178; Top Overlay "dig 1" at 5639.41,2959.38 h59.05 r178; Top Overlay "DIO" at 5642.18,2770.8 h59.05 r181; Top Overlay "CLK" at 5634.58,2674.79 h59.05 r181; Top Overlay "k1" at 5641.7,2565.49 h59.05 r180; Top Overlay "k2" at 5639.59,2461.38 h59.05 r180